# Altium PCB RelayBoard.PcbDoc (part 2 of 2)
Units mm, origin at the board's own origin, x right, y up, seen from the top; angles counter-clockwise.
Board outline 355 x 125 mm, 2 copper layers (Top Layer, Bottom Layer); 146 components, 100 nets, 450 pads, 452 vias.
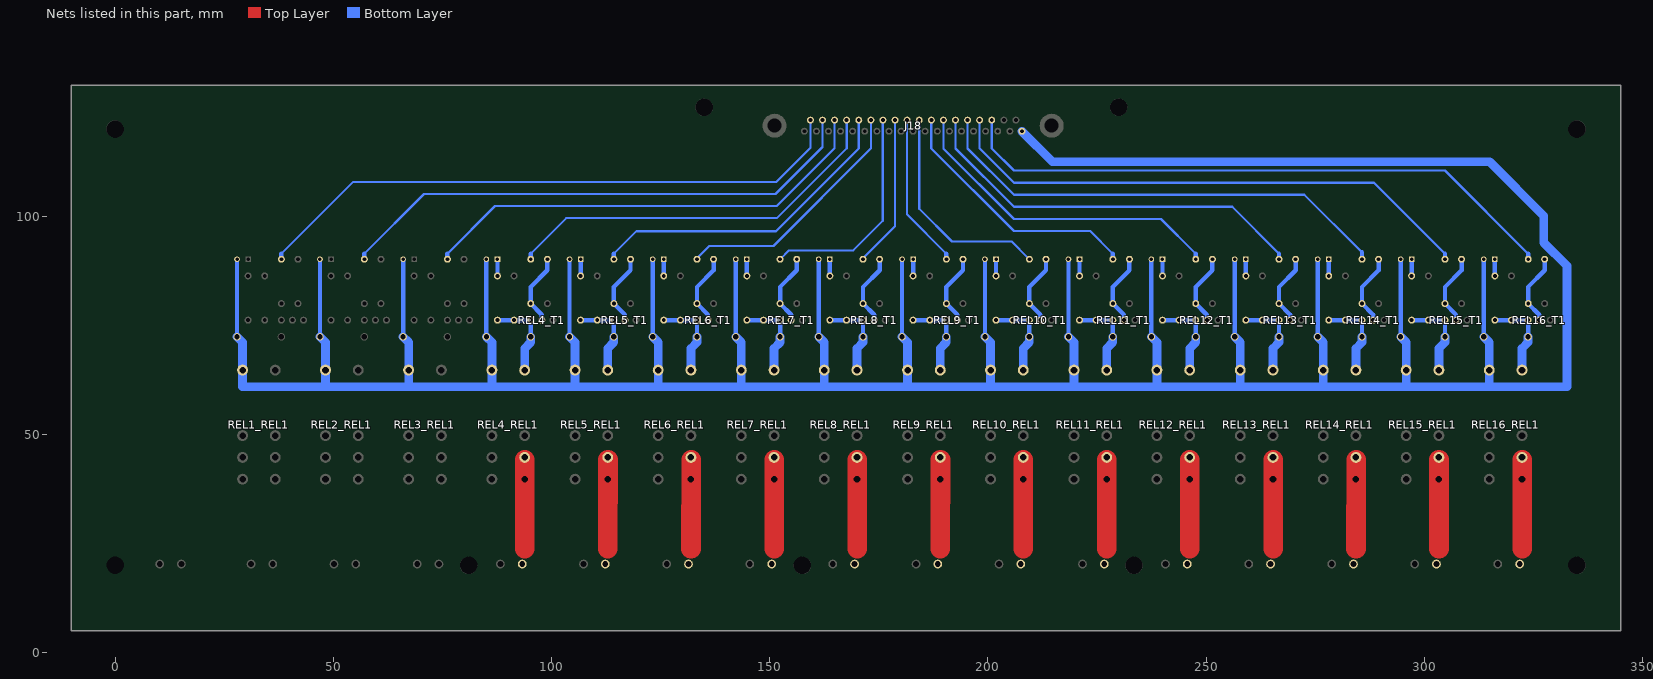
[diagram p2: the nets of this part, all layers, seen from the top]

## Via types
v1: diameter 1.6, hole 0.9, Top Layer to Bottom Layer, 452 vias

## Nets (pads, with @x,y where several pads share a name; then routed paths per layer and width w, separated by ;. In a path a pad name is that pad's centre, name@x,y a point inside that pad or via, vN(x,y) a via of type N, cw(c..) or ccw(c..) an arc to the next point about the centre after c; other vN are vias at no path point) (continued)
NetREL4_D1_2: REL4_D1.2 REL4_R1_3.1 REL4_R1_4.1 REL4_REL1.8 REL4_T1.3 | length 19.6
  Bottom Layer w1: REL4_R1_3.1@87.63,76.2 REL4_R1_4.1@91.44,76.2 REL4_T1.3@95.25,76.2 REL4_D1.2@95.25,72.39
  Bottom Layer w2: REL4_REL1.8@93.86,64.77 93.86,69.73 95.25,71.12 REL4_D1.2@95.25,72.39
NetREL4_J2_2: REL4_J2.2 REL4_REL1.6 | length 20.4
  Top Layer w4.5: 93.885,23.855 REL4_REL1.6@93.9,44.25
NetREL4_LD1_1: REL4_LD1.1 REL4_R1_3.2 | length 3.8
  Bottom Layer w1: REL4_R1_3.2@87.63,86.36 REL4_LD1.1@87.63,90.17
NetREL4_R1_1_2: REL4_R1_1.2 REL4_R1_2.2 REL4_T1.2 | length 16.6
  Bottom Layer w1: REL4_T1.2@97.79,76.2 97.79,77.47 REL4_R1_1.2@95.25,80.01 95.25,83.82 99.06,87.63 REL4_R1_2.2@99.06,90.17
NetREL5_D1_2: REL5_D1.2 REL5_R1_3.1 REL5_R1_4.1 REL5_REL1.8 REL5_T1.3 | length 19.6
  Bottom Layer w1: REL5_R1_3.1@106.68,76.2 REL5_R1_4.1@110.49,76.2 REL5_T1.3@114.3,76.2 REL5_D1.2@114.3,72.39
  Bottom Layer w2: REL5_REL1.8@112.91,64.77 112.91,69.73 114.3,71.12 REL5_D1.2@114.3,72.39
NetREL5_J2_2: REL5_J2.2 REL5_REL1.6 | length 20.4
  Top Layer w4.5: 112.935,23.855 REL5_REL1.6@112.95,44.25
NetREL5_LD1_1: REL5_LD1.1 REL5_R1_3.2 | length 3.8
  Bottom Layer w1: REL5_R1_3.2@106.68,86.36 REL5_LD1.1@106.68,90.17
NetREL5_R1_1_2: REL5_R1_1.2 REL5_R1_2.2 REL5_T1.2 | length 16.6
  Bottom Layer w1: REL5_T1.2@116.84,76.2 116.84,77.47 REL5_R1_1.2@114.3,80.01 114.3,83.82 118.11,87.63 REL5_R1_2.2@118.11,90.17
NetREL6_D1_2: REL6_D1.2 REL6_R1_3.1 REL6_R1_4.1 REL6_REL1.8 REL6_T1.3 | length 19.6
  Bottom Layer w1: REL6_R1_3.1@125.73,76.2 REL6_R1_4.1@129.54,76.2 REL6_T1.3@133.35,76.2 REL6_D1.2@133.35,72.39
  Bottom Layer w2: REL6_REL1.8@131.96,64.77 131.96,69.73 133.35,71.12 REL6_D1.2@133.35,72.39
NetREL6_J2_2: REL6_J2.2 REL6_REL1.6 | length 20.4
  Top Layer w4.5: 131.985,23.855 REL6_REL1.6@132,44.25
NetREL6_LD1_1: REL6_LD1.1 REL6_R1_3.2 | length 3.8
  Bottom Layer w1: REL6_R1_3.2@125.73,86.36 REL6_LD1.1@125.73,90.17
NetREL6_R1_1_2: REL6_R1_1.2 REL6_R1_2.2 REL6_T1.2 | length 16.6
  Bottom Layer w1: REL6_T1.2@135.89,76.2 135.89,77.47 REL6_R1_1.2@133.35,80.01 133.35,83.82 137.16,87.63 REL6_R1_2.2@137.16,90.17
NetREL7_D1_2: REL7_D1.2 REL7_R1_3.1 REL7_R1_4.1 REL7_REL1.8 REL7_T1.3 | length 19.6
  Bottom Layer w1: REL7_R1_3.1@144.78,76.2 REL7_R1_4.1@148.59,76.2 REL7_T1.3@152.4,76.2 REL7_D1.2@152.4,72.39
  Bottom Layer w2: REL7_REL1.8@151.01,64.77 151.01,69.73 152.4,71.12 REL7_D1.2@152.4,72.39
NetREL7_J2_2: REL7_J2.2 REL7_REL1.6 | length 20.4
  Top Layer w4.5: 151.035,23.855 REL7_REL1.6@151.05,44.25
NetREL7_LD1_1: REL7_LD1.1 REL7_R1_3.2 | length 3.8
  Bottom Layer w1: REL7_R1_3.2@144.78,86.36 REL7_LD1.1@144.78,90.17
NetREL7_R1_1_2: REL7_R1_1.2 REL7_R1_2.2 REL7_T1.2 | length 16.6
  Bottom Layer w1: REL7_T1.2@154.94,76.2 154.94,77.47 REL7_R1_1.2@152.4,80.01 152.4,83.82 156.21,87.63 REL7_R1_2.2@156.21,90.17
NetREL8_D1_2: REL8_D1.2 REL8_R1_3.1 REL8_R1_4.1 REL8_REL1.8 REL8_T1.3 | length 19.6
  Bottom Layer w1: REL8_R1_3.1@163.79,76.2 REL8_R1_4.1@167.6,76.2 REL8_T1.3@171.41,76.2 REL8_D1.2@171.41,72.39
  Bottom Layer w2: REL8_REL1.8@170.02,64.77 170.02,69.73 171.41,71.12 REL8_D1.2@171.41,72.39
NetREL8_J2_2: REL8_J2.2 REL8_REL1.6 | length 20.4
  Top Layer w4.5: 170.045,23.855 REL8_REL1.6@170.06,44.25
NetREL8_LD1_1: REL8_LD1.1 REL8_R1_3.2 | length 3.8
  Bottom Layer w1: REL8_R1_3.2@163.79,86.36 REL8_LD1.1@163.79,90.17
NetREL8_R1_1_2: REL8_R1_1.2 REL8_R1_2.2 REL8_T1.2 | length 16.6
  Bottom Layer w1: REL8_T1.2@173.95,76.2 173.95,77.47 REL8_R1_1.2@171.41,80.01 171.41,83.82 175.22,87.63 REL8_R1_2.2@175.22,90.17
NetREL9_D1_2: REL9_D1.2 REL9_R1_3.1 REL9_R1_4.1 REL9_REL1.8 REL9_T1.3 | length 19.6
  Bottom Layer w1: REL9_R1_3.1@182.88,76.2 REL9_R1_4.1@186.69,76.2 REL9_T1.3@190.5,76.2 REL9_D1.2@190.5,72.39
  Bottom Layer w2: REL9_REL1.8@189.11,64.77 189.11,69.73 190.5,71.12 REL9_D1.2@190.5,72.39
NetREL9_J2_2: REL9_J2.2 REL9_REL1.6 | length 20.4
  Top Layer w4.5: 189.135,23.855 REL9_REL1.6@189.15,44.25
NetREL9_LD1_1: REL9_LD1.1 REL9_R1_3.2 | length 3.8
  Bottom Layer w1: REL9_R1_3.2@182.88,86.36 REL9_LD1.1@182.88,90.17
NetREL9_R1_1_2: REL9_R1_1.2 REL9_R1_2.2 REL9_T1.2 | length 16.6
  Bottom Layer w1: REL9_T1.2@193.04,76.2 193.04,77.47 REL9_R1_1.2@190.5,80.01 190.5,83.82 194.31,87.63 REL9_R1_2.2@194.31,90.17
NetREL10_D1_2: REL10_D1.2 REL10_R1_3.1 REL10_R1_4.1 REL10_REL1.8 REL10_T1.3 | length 19.6
  Bottom Layer w1: REL10_R1_3.1@201.89,76.2 REL10_R1_4.1@205.7,76.2 REL10_T1.3@209.51,76.2 REL10_D1.2@209.51,72.39
  Bottom Layer w2: REL10_REL1.8@208.12,64.77 208.12,69.73 209.51,71.12 REL10_D1.2@209.51,72.39
NetREL10_J2_2: REL10_J2.2 REL10_REL1.6 | length 20.4
  Top Layer w4.5: 208.145,23.855 REL10_REL1.6@208.16,44.25
NetREL10_LD1_1: REL10_LD1.1 REL10_R1_3.2 | length 3.8
  Bottom Layer w1: REL10_R1_3.2@201.89,86.36 REL10_LD1.1@201.89,90.17
NetREL10_R1_1_2: REL10_R1_1.2 REL10_R1_2.2 REL10_T1.2 | length 16.6
  Bottom Layer w1: REL10_T1.2@212.05,76.2 212.05,77.47 REL10_R1_1.2@209.51,80.01 209.51,83.82 213.32,87.63 REL10_R1_2.2@213.32,90.17
NetREL11_D1_2: REL11_D1.2 REL11_R1_3.1 REL11_R1_4.1 REL11_REL1.8 REL11_T1.3 | length 19.6
  Bottom Layer w1: REL11_R1_3.1@221.02,76.2 REL11_R1_4.1@224.83,76.2 REL11_T1.3@228.64,76.2 REL11_D1.2@228.64,72.39
  Bottom Layer w2: REL11_REL1.8@227.25,64.77 227.25,69.73 228.64,71.12 REL11_D1.2@228.64,72.39
NetREL11_J2_2: REL11_J2.2 REL11_REL1.6 | length 20.4
  Top Layer w4.5: 227.275,23.855 REL11_REL1.6@227.29,44.25
NetREL11_LD1_1: REL11_LD1.1 REL11_R1_3.2 | length 3.8
  Bottom Layer w1: REL11_R1_3.2@221.02,86.36 REL11_LD1.1@221.02,90.17
NetREL11_R1_1_2: REL11_R1_1.2 REL11_R1_2.2 REL11_T1.2 | length 16.6
  Bottom Layer w1: REL11_T1.2@231.18,76.2 231.18,77.47 REL11_R1_1.2@228.64,80.01 228.64,83.82 232.45,87.63 REL11_R1_2.2@232.45,90.17
NetREL12_D1_2: REL12_D1.2 REL12_R1_3.1 REL12_R1_4.1 REL12_REL1.8 REL12_T1.3 | length 19.6
  Bottom Layer w1: REL12_R1_3.1@240.03,76.2 REL12_R1_4.1@243.84,76.2 REL12_T1.3@247.65,76.2 REL12_D1.2@247.65,72.39
  Bottom Layer w2: REL12_REL1.8@246.26,64.77 246.26,69.73 247.65,71.12 REL12_D1.2@247.65,72.39
NetREL12_J2_2: REL12_J2.2 REL12_REL1.6 | length 20.4
  Top Layer w4.5: 246.285,23.855 REL12_REL1.6@246.3,44.25
NetREL12_LD1_1: REL12_LD1.1 REL12_R1_3.2 | length 3.8
  Bottom Layer w1: REL12_R1_3.2@240.03,86.36 REL12_LD1.1@240.03,90.17
NetREL12_R1_1_2: REL12_R1_1.2 REL12_R1_2.2 REL12_T1.2 | length 16.6
  Bottom Layer w1: REL12_T1.2@250.19,76.2 250.19,77.47 REL12_R1_1.2@247.65,80.01 247.65,83.82 251.46,87.63 REL12_R1_2.2@251.46,90.17
NetREL13_D1_2: REL13_D1.2 REL13_R1_3.1 REL13_R1_4.1 REL13_REL1.8 REL13_T1.3 | length 19.6
  Bottom Layer w1: REL13_R1_3.1@259.12,76.2 REL13_R1_4.1@262.93,76.2 REL13_T1.3@266.74,76.2 REL13_D1.2@266.74,72.39
  Bottom Layer w2: REL13_REL1.8@265.35,64.77 265.35,69.73 266.74,71.12 REL13_D1.2@266.74,72.39
NetREL13_J2_2: REL13_J2.2 REL13_REL1.6 | length 20.4
  Top Layer w4.5: 265.375,23.855 REL13_REL1.6@265.39,44.25
NetREL13_LD1_1: REL13_LD1.1 REL13_R1_3.2 | length 3.8
  Bottom Layer w1: REL13_R1_3.2@259.12,86.36 REL13_LD1.1@259.12,90.17
NetREL13_R1_1_2: REL13_R1_1.2 REL13_R1_2.2 REL13_T1.2 | length 16.6
  Bottom Layer w1: REL13_T1.2@269.28,76.2 269.28,77.47 REL13_R1_1.2@266.74,80.01 266.74,83.82 270.55,87.63 REL13_R1_2.2@270.55,90.17
NetREL14_D1_2: REL14_D1.2 REL14_R1_3.1 REL14_R1_4.1 REL14_REL1.8 REL14_T1.3 | length 19.6
  Bottom Layer w1: REL14_R1_3.1@278.13,76.2 REL14_R1_4.1@281.94,76.2 REL14_T1.3@285.75,76.2 REL14_D1.2@285.75,72.39
  Bottom Layer w2: REL14_REL1.8@284.36,64.77 284.36,69.73 285.75,71.12 REL14_D1.2@285.75,72.39
NetREL14_J2_2: REL14_J2.2 REL14_REL1.6 | length 20.4
  Top Layer w4.5: 284.385,23.855 REL14_REL1.6@284.4,44.25
NetREL14_LD1_1: REL14_LD1.1 REL14_R1_3.2 | length 3.8
  Bottom Layer w1: REL14_R1_3.2@278.13,86.36 REL14_LD1.1@278.13,90.17
NetREL14_R1_1_2: REL14_R1_1.2 REL14_R1_2.2 REL14_T1.2 | length 16.6
  Bottom Layer w1: REL14_T1.2@288.29,76.2 288.29,77.47 REL14_R1_1.2@285.75,80.01 285.75,83.82 289.56,87.63 REL14_R1_2.2@289.56,90.17
NetREL15_D1_2: REL15_D1.2 REL15_R1_3.1 REL15_R1_4.1 REL15_REL1.8 REL15_T1.3 | length 19.6
  Bottom Layer w1: REL15_R1_3.1@297.14,76.2 REL15_R1_4.1@300.95,76.2 REL15_T1.3@304.76,76.2 REL15_D1.2@304.76,72.39
  Bottom Layer w2: REL15_REL1.8@303.37,64.77 303.37,69.73 304.76,71.12 REL15_D1.2@304.76,72.39
NetREL15_J2_2: REL15_J2.2 REL15_REL1.6 | length 20.4
  Top Layer w4.5: 303.395,23.855 REL15_REL1.6@303.41,44.25
NetREL15_LD1_1: REL15_LD1.1 REL15_R1_3.2 | length 3.8
  Bottom Layer w1: REL15_R1_3.2@297.14,86.36 REL15_LD1.1@297.14,90.17
NetREL15_R1_1_2: REL15_R1_1.2 REL15_R1_2.2 REL15_T1.2 | length 16.6
  Bottom Layer w1: REL15_T1.2@307.3,76.2 307.3,77.47 REL15_R1_1.2@304.76,80.01 304.76,83.82 308.57,87.63 REL15_R1_2.2@308.57,90.17
NetREL16_D1_2: REL16_D1.2 REL16_R1_3.1 REL16_R1_4.1 REL16_REL1.8 REL16_T1.3 | length 19.6
  Bottom Layer w1: REL16_R1_3.1@316.19,76.2 REL16_R1_4.1@320,76.2 REL16_T1.3@323.81,76.2 REL16_D1.2@323.81,72.39
  Bottom Layer w2: REL16_REL1.8@322.42,64.77 322.42,69.73 323.81,71.12 REL16_D1.2@323.81,72.39
NetREL16_J2_2: REL16_J2.2 REL16_REL1.6 | length 20.4
  Top Layer w4.5: 322.445,23.855 REL16_REL1.6@322.46,44.25
NetREL16_LD1_1: REL16_LD1.1 REL16_R1_3.2 | length 3.8
  Bottom Layer w1: REL16_R1_3.2@316.19,86.36 REL16_LD1.1@316.19,90.17
NetREL16_R1_1_2: REL16_R1_1.2 REL16_R1_2.2 REL16_T1.2 | length 16.6
  Bottom Layer w1: REL16_T1.2@326.35,76.2 326.35,77.47 323.81,80.01 323.81,83.82 327.62,87.63 REL16_R1_2.2@327.62,90.17
R1: J18.22 REL16_R1_1.1 | length 141
  Bottom Layer w0.5: J18.22@200.9,121.793 200.9,115.57 205.98,110.49 304.76,110.49 323.81,91.44 ; REL16_R1_1.1@323.81,90.17 323.81,90.13 REL16_R1_1.1@323.85,90.17 REL16_R1_1.1@323.85,90.693
  Bottom Layer w1: REL16_R1_1.1@323.81,90.17 323.81,91.44
R2: J18.23 REL15_R1_1.1 | length 124.4
  Top Layer w1: REL15_R1_1.1@304.76,90.17 REL15_R1_1.1@304.76,90.46
  Bottom Layer w0.5: J18.23@198.13,121.793 198.13,115.57 205.98,107.72 288.48,107.72 304.76,91.44
  Bottom Layer w1: REL15_R1_1.1@304.76,90.21 304.76,91.44
R3: J18.24 REL14_R1_1.1 | length 108.1
  Bottom Layer w0.5: J18.24@195.36,121.793 195.36,115.57 205.98,104.95 272.542,104.95 285.75,91.742
  Bottom Layer w1: REL14_R1_1.1@285.75,90.17 285.75,91.742
R4: J18.25 REL13_R1_1.1 | length 91.7
  Bottom Layer w0.5: J18.25@192.59,121.793 192.59,115.57 205.98,102.18 256,102.18 266.74,91.44
  Bottom Layer w1: REL13_R1_1.1@266.7,90.17 266.74,90.21 266.74,91.44
R5: J18.26 REL12_R1_1.1 | length 75.3
  Bottom Layer w0.5: J18.26@189.82,121.793 189.82,115.57 205.98,99.41 239.68,99.41 247.65,91.44
  Bottom Layer w1: REL12_R1_1.1@247.65,90.17 247.65,91.44
R6: J18.27 REL11_R1_1.1 | length 59.1
  Bottom Layer w0.5: J18.27@187.05,121.793 187.05,115.57 205.98,96.64 223.44,96.64 228.64,91.44
  Bottom Layer w1: REL11_R1_1.1@228.6,90.17 228.6,91.4 228.64,91.44
R7: J18.28 REL10_R1_1.1 | length 49.8
  Bottom Layer w0.5: J18.28@184.28,121.793 184.28,101.724 191.77,94.234 205.486,94.234 REL10_R1_1.1@209.296,90.424
R8: J18.29 REL9_R1_1.1 | length 35.3
  Bottom Layer w0.5: J18.29@181.51,121.793 181.51,100.43 190.5,91.44
  Bottom Layer w1: REL9_R1_1.1@190.5,90.17 190.5,91.44
R9: J18.30 REL8_R1_1.1 | length 34.4
  Bottom Layer w0.5: REL8_R1_1.1@171.41,90.384 178.74,97.714 J18.30@178.74,121.793
R10: J18.31 REL7_R1_1.1 | length 50
  Bottom Layer w0.5: REL7_R1_1.1@152.4,90.17 154.432,92.202 169.164,92.202 175.92,98.958 J18.31@175.92,121.793
R11: J18.32 REL6_R1_1.1 | length 56.5
  Bottom Layer w0.5: REL6_R1_1.1@133.35,90.424 136.144,93.218 150.876,93.218 173.2,115.542 J18.32@173.2,121.793
R12: J18.33 REL5_R1_1.1 | length 73.6
  Bottom Layer w0.5: 114.3,91.44 119.462,96.602 151.466,96.602 170.43,115.566 J18.33@170.43,121.793
  Bottom Layer w1: REL5_R1_1.1@114.3,90.17 114.3,91.44
R13: J18.34 REL4_R1_1.1 | length 89.9
  Bottom Layer w0.5: 95.25,91.44 103.402,99.592 151.662,99.592 167.66,115.59 J18.34@167.66,121.793
  Bottom Layer w1: REL4_R1_1.1@95.25,90.17 95.25,91.44
R14: J18.35 REL3_R1_1.1 | length 106.2
  Bottom Layer w0.5: 76.16,91.44 87.082,102.362 151.638,102.362 164.87,115.594 J18.35@164.87,121.793 ; J18.35@164.87,121.773 J18.35@164.89,121.793
  Bottom Layer w1: 76.16,91.44 76.16,90.21 REL3_R1_1.1@76.2,90.17
R15: J18.36 REL2_R1_1.1 | length 122.3
  Bottom Layer w0.5: 57.11,91.44 70.802,105.132 151.36,105.132 162.1,115.872 162.1,121.773 J18.36@162.12,121.793
  Bottom Layer w1: REL2_R1_1.1@57.11,90.17 57.11,91.44
R16: J18.37 REL1_R1_1.1 | length 138.7
  Bottom Layer w0.5: 38.1,91.44 54.562,107.902 151.59,107.902 159.33,115.642 J18.37@159.33,121.793 ; J18.37@159.33,121.773 J18.37@159.35,121.793
  Bottom Layer w1: REL1_R1_1.1@38.1,90.17 38.1,91.44
VCC: J18.1 REL1_D1.1 REL1_LD1.2 REL1_REL1.1 REL2_D1.1 REL2_LD1.2 REL2_REL1.1 REL3_D1.1 REL3_LD1.2 REL3_REL1.1 REL4_D1.1 REL4_LD1.2 REL4_REL1.1 REL5_D1.1 REL5_LD1.2 REL5_REL1.1 REL6_D1.1 REL6_LD1.2 REL6_REL1.1 REL7_D1.1 REL7_LD1.2 REL7_REL1.1 REL8_D1.1 REL8_LD1.2 REL8_REL1.1 REL9_D1.1 REL9_LD1.2 REL9_REL1.1 REL10_D1.1 REL10_LD1.2 REL10_REL1.1 REL11_D1.1 REL11_LD1.2 REL11_REL1.1 REL12_D1.1 REL12_LD1.2 REL12_REL1.1 REL13_D1.1 REL13_LD1.2 REL13_REL1.1 REL14_D1.1 REL14_LD1.2 REL14_REL1.1 REL15_D1.1 REL15_LD1.2 REL15_REL1.1 REL16_D1.1 REL16_LD1.2 REL16_REL1.1 | length 948.1
  Bottom Layer w1: REL1_D1.1@27.94,72.39 REL1_LD1.2@27.94,90.17 ; REL2_D1.1@46.95,72.39 REL2_LD1.2@46.95,90.17 ; REL3_D1.1@66,72.39 REL3_LD1.2@66,90.17 ; REL4_D1.1@85.09,72.39 REL4_LD1.2@85.09,90.17 ; REL5_D1.1@104.14,72.39 REL5_LD1.2@104.14,90.17 ; REL6_D1.1@123.19,72.39 REL6_LD1.2@123.19,90.17 ; REL7_D1.1@142.24,72.39 REL7_LD1.2@142.24,90.17 ; REL8_D1.1@161.25,72.39 REL8_LD1.2@161.25,90.17 ; REL9_D1.1@180.34,72.39 REL9_LD1.2@180.34,90.17 ; REL10_D1.1@199.35,72.39 REL10_LD1.2@199.35,90.17 ; REL11_D1.1@218.48,72.39 REL11_LD1.2@218.48,90.17 ; REL12_D1.1@237.49,72.39 REL12_LD1.2@237.49,90.17 ; REL13_D1.1@256.58,72.39 REL13_LD1.2@256.58,90.17 ; REL14_D1.1@275.59,72.39 REL14_LD1.2@275.59,90.17 ; REL15_D1.1@294.6,72.39 REL15_LD1.2@294.6,90.17 ; REL16_D1.1@313.65,72.39 REL16_LD1.2@313.65,90.17
  Bottom Layer w2: REL1_D1.1@27.94,72.39 29.21,71.12 REL1_REL1.1@29.21,64.77 29.21,60.96 48.22,60.96 ; REL2_D1.1@46.95,72.39 48.22,71.12 REL2_REL1.1@48.22,64.77 48.22,60.96 ; REL3_D1.1@66,72.39 67.27,71.12 REL3_REL1.1@67.27,64.77 67.27,60.96 ; REL4_D1.1@85.09,72.39 86.36,71.12 REL4_REL1.1@86.36,64.77 86.36,60.96 ; REL5_D1.1@104.14,72.39 105.41,71.12 REL5_REL1.1@105.41,64.77 105.41,60.96 ; REL6_D1.1@123.19,72.39 124.46,71.12 REL6_REL1.1@124.46,64.77 124.46,60.96 ; REL7_D1.1@142.24,72.39 143.51,71.12 REL7_REL1.1@143.51,64.77 143.51,60.96 ; REL8_D1.1@161.25,72.39 162.52,71.12 REL8_REL1.1@162.52,64.77 162.52,61 162.56,60.96 ; REL9_D1.1@180.34,72.39 181.61,71.12 REL9_REL1.1@181.61,64.77 181.61,60.96 ; REL10_D1.1@199.35,72.39 200.62,71.12 REL10_REL1.1@200.62,64.77 200.62,61.428 ; J18.1@207.81,119.507 214.817,112.5 315,112.5 327.406,100.094 327.406,93.98 332.74,88.646 332.74,60.96 314.96,60.96 314.92,60.92 REL16_REL1.1@314.92,64.77 314.92,71.12 REL16_D1.1@313.65,72.39 ; REL11_D1.1@218.48,72.39 219.75,71.12 REL11_REL1.1@219.75,64.77 219.75,61 ; REL12_D1.1@237.49,72.39 238.76,71.12 REL12_REL1.1@238.76,64.77 238.76,60.96 ; REL13_D1.1@256.58,72.39 257.85,71.12 REL13_REL1.1@257.85,64.77 257.85,61.174 ; REL14_D1.1@275.59,72.39 276.86,71.12 REL14_REL1.1@276.86,64.77 276.86,60.96 ; REL15_D1.1@294.6,72.39 295.87,71.12 REL15_REL1.1@295.87,64.77 295.87,61 ; 315.468,60.96 276.86,60.96 ; 48.22,60.96 67.27,60.96 ; 67.27,60.96 86.36,60.96 ; 86.36,60.96 105.41,60.96 ; 105.41,60.96 124.46,60.96 ; 124.46,60.96 143.51,60.96 ; 143.51,60.96 162.56,60.96 ; 162.56,60.96 181.61,60.96 ; 181.61,60.96 238.76,60.96 ; 238.76,60.96 276.86,60.96
pads on no net: J18.2 J18.3 J18.21 J18.38 J18.39 REL1_REL1.2 REL1_REL1.3 REL1_REL1.5 REL1_REL1.7 REL2_REL1.2 REL2_REL1.3 REL2_REL1.5 REL2_REL1.7 REL3_REL1.2 REL3_REL1.3 REL3_REL1.5 REL3_REL1.7 REL4_REL1.2 REL4_REL1.3 REL4_REL1.5 REL4_REL1.7 REL5_REL1.2 REL5_REL1.3 REL5_REL1.5 REL5_REL1.7 REL6_REL1.2 REL6_REL1.3 REL6_REL1.5 REL6_REL1.7 REL7_REL1.2 REL7_REL1.3 REL7_REL1.5 REL7_REL1.7 REL8_REL1.2 REL8_REL1.3 REL8_REL1.5 REL8_REL1.7 REL9_REL1.2 REL9_REL1.3 REL9_REL1.5 REL9_REL1.7 REL10_REL1.2 REL10_REL1.3 REL10_REL1.5 REL10_REL1.7 REL11_REL1.2 REL11_REL1.3 REL11_REL1.5 REL11_REL1.7 REL12_REL1.2 REL12_REL1.3 REL12_REL1.5 REL12_REL1.7 REL13_REL1.2 REL13_REL1.3 REL13_REL1.5 REL13_REL1.7 REL14_REL1.2 REL14_REL1.3 REL14_REL1.5 REL14_REL1.7 REL15_REL1.2 REL15_REL1.3 REL15_REL1.5 REL15_REL1.7 REL16_REL1.2 REL16_REL1.3 REL16_REL1.5 REL16_REL1.7
copper on no net: | length 960
  Top Layer w1.2: -10,5 345,5 345,130 -10,130 -10,5
  other v1: -2.54,60.96 0,60.96 2.54,60.96 5.08,60.96 7.62,60.96 10.16,60.96 12.7,60.96 15.24,60.96 -2.54,63.5 0,63.5 2.54,63.5 5.08,63.5 7.62,63.5 10.16,63.5 12.7,63.5 15.24,63.5 -2.54,66.04 0,66.04 2.54,66.04 5.08,66.04 7.62,66.04 10.16,66.04 12.7,66.04 15.24,66.04 -2.54,68.58 0,68.58 2.54,68.58 5.08,68.58 7.62,68.58 10.16,68.58 12.7,68.58 15.24,68.58 -2.54,71.12 0,71.12 2.54,71.12 5.08,71.12 7.62,71.12 10.16,71.12 12.7,71.12 15.24,71.12 -2.54,73.66 0,73.66 2.54,73.66 5.08,73.66 7.62,73.66 10.16,73.66 12.7,73.66 15.24,73.66 -2.54,76.2 0,76.2 2.54,76.2 5.08,76.2 7.62,76.2 10.16,76.2 12.7,76.2 15.24,76.2 -2.54,78.74 0,78.74 2.54,78.74 5.08,78.74 7.62,78.74 10.16,78.74 12.7,78.74 15.24,78.74 -2.54,81.28 0,81.28 2.54,81.28 5.08,81.28 7.62,81.28 10.16,81.28 12.7,81.28 15.24,81.28 -2.54,83.82 0,83.82 2.54,83.82 5.08,83.82 7.62,83.82 10.16,83.82 12.7,83.82 15.24,83.82 -2.54,86.36 0,86.36 2.54,86.36 5.08,86.36 7.62,86.36 10.16,86.36 12.7,86.36 15.24,86.36 -2.54,88.9 0,88.9 2.54,88.9 5.08,88.9 7.62,88.9 10.16,88.9 12.7,88.9 15.24,88.9 -2.54,91.44 0,91.44 2.54,91.44 5.08,91.44 7.62,91.44 10.16,91.44 12.7,91.44 15.24,91.44 17.78,91.44 20.32,91.44 22.86,91.44 25.4,91.44 -2.54,93.98 0,93.98 2.54,93.98 5.08,93.98 7.62,93.98 10.16,93.98 12.7,93.98 15.24,93.98 17.78,93.98 20.32,93.98 22.86,93.98 25.4,93.98 -2.54,96.52 0,96.52 2.54,96.52 5.08,96.52 7.62,96.52 10.16,96.52 12.7,96.52 15.24,96.52 17.78,96.52 20.32,96.52 22.86,96.52 25.4,96.52 -2.54,99.06 0,99.06 2.54,99.06 5.08,99.06 7.62,99.06 10.16,99.06 12.7,99.06 15.24,99.06 17.78,99.06 20.32,99.06 22.86,99.06 25.4,99.06 -2.54,101.6 0,101.6 2.54,101.6 5.08,101.6 7.62,101.6 10.16,101.6 12.7,101.6 15.24,101.6 17.78,101.6 20.32,101.6 22.86,101.6 25.4,101.6 5.08,104.14 7.62,104.14 10.16,104.14 12.7,104.14 15.24,104.14 17.78,104.14 20.32,104.14 22.86,104.14 25.4,104.14 5.08,106.68 7.62,106.68 10.16,106.68 12.7,106.68 15.24,106.68 17.78,106.68 20.32,106.68 22.86,106.68 25.4,106.68 5.08,109.22 7.62,109.22 10.16,109.22 12.7,109.22 15.24,109.22 17.78,109.22 20.32,109.22 22.86,109.22 25.4,109.22 27.94,109.22 30.48,109.22 33.02,109.22 35.56,109.22 38.1,109.22 40.64,109.22 43.18,109.22 5.08,111.76 7.62,111.76 10.16,111.76 12.7,111.76 15.24,111.76 17.78,111.76 20.32,111.76 22.86,111.76 25.4,111.76 27.94,111.76 30.48,111.76 33.02,111.76 35.56,111.76 38.1,111.76 40.64,111.76 43.18,111.76 45.72,111.76 5.08,114.3 7.62,114.3 10.16,114.3 12.7,114.3 15.24,114.3 17.78,114.3 20.32,114.3 22.86,114.3 25.4,114.3 27.94,114.3 30.48,114.3 33.02,114.3 35.56,114.3 38.1,114.3 40.64,114.3 43.18,114.3 45.72,114.3 48.26,114.3 50.8,114.3 53.34,114.3 55.88,114.3 58.42,114.3 60.96,114.3 63.5,114.3 66.04,114.3 68.58,114.3 71.12,114.3 73.66,114.3 76.2,114.3 78.74,114.3 81.28,114.3 83.82,114.3 86.36,114.3 88.9,114.3 91.44,114.3 93.98,114.3 96.52,114.3 99.06,114.3 101.6,114.3 104.14,114.3 106.68,114.3 109.22,114.3 111.76,114.3 114.3,114.3 116.84,114.3 119.38,114.3 121.92,114.3 124.46,114.3 127,114.3 5.08,116.84 7.62,116.84 10.16,116.84 12.7,116.84 15.24,116.84 17.78,116.84 20.32,116.84 22.86,116.84 25.4,116.84 27.94,116.84 30.48,116.84 33.02,116.84 35.56,116.84 38.1,116.84 40.64,116.84 43.18,116.84 45.72,116.84 48.26,116.84 50.8,116.84 53.34,116.84 55.88,116.84 58.42,116.84 60.96,116.84 63.5,116.84 66.04,116.84 68.58,116.84 71.12,116.84 73.66,116.84 76.2,116.84 78.74,116.84 81.28,116.84 83.82,116.84 86.36,116.84 88.9,116.84 91.44,116.84 93.98,116.84 96.52,116.84 99.06,116.84 101.6,116.84 104.14,116.84 106.68,116.84 109.22,116.84 111.76,116.84 114.3,116.84 116.84,116.84 119.38,116.84 121.92,116.84 124.46,116.84 127,116.84 5.08,119.38 7.62,119.38 10.16,119.38 12.7,119.38 15.24,119.38 17.78,119.38 20.32,119.38 22.86,119.38 25.4,119.38 27.94,119.38 30.48,119.38 33.02,119.38 35.56,119.38 38.1,119.38 40.64,119.38 43.18,119.38 45.72,119.38 48.26,119.38 50.8,119.38 53.34,119.38 55.88,119.38 58.42,119.38 60.96,119.38 63.5,119.38 66.04,119.38 68.58,119.38 71.12,119.38 73.66,119.38 76.2,119.38 78.74,119.38 81.28,119.38 83.82,119.38 86.36,119.38 88.9,119.38 91.44,119.38 93.98,119.38 96.52,119.38 99.06,119.38 101.6,119.38 104.14,119.38 106.68,119.38 109.22,119.38 111.76,119.38 114.3,119.38 116.84,119.38 119.38,119.38 121.92,119.38 124.46,119.38 127,119.38 5.08,121.92 7.62,121.92 10.16,121.92 12.7,121.92 15.24,121.92 17.78,121.92 20.32,121.92 22.86,121.92 25.4,121.92 27.94,121.92 30.48,121.92 33.02,121.92 35.56,121.92 38.1,121.92 40.64,121.92 43.18,121.92 45.72,121.92 48.26,121.92 50.8,121.92 53.34,121.92 55.88,121.92 58.42,121.92 60.96,121.92 63.5,121.92 66.04,121.92 68.58,121.92 71.12,121.92 73.66,121.92 76.2,121.92 78.74,121.92 81.28,121.92 83.82,121.92 86.36,121.92 88.9,121.92 91.44,121.92 93.98,121.92 96.52,121.92 99.06,121.92 101.6,121.92 104.14,121.92 106.68,121.92 109.22,121.92 111.76,121.92 114.3,121.92 116.84,121.92 119.38,121.92 121.92,121.92 124.46,121.92 127,121.92 5.08,124.46 7.62,124.46 10.16,124.46 12.7,124.46 15.24,124.46 17.78,124.46 20.32,124.46 22.86,124.46 25.4,124.46 27.94,124.46 30.48,124.46 33.02,124.46 35.56,124.46 38.1,124.46 40.64,124.46 43.18,124.46 45.72,124.46 48.26,124.46 50.8,124.46 53.34,124.46 55.88,124.46 58.42,124.46 60.96,124.46 63.5,124.46 66.04,124.46 68.58,124.46 71.12,124.46 73.66,124.46 76.2,124.46 78.74,124.46 81.28,124.46 83.82,124.46 86.36,124.46 88.9,124.46 91.44,124.46 93.98,124.46 96.52,124.46 99.06,124.46 101.6,124.46 104.14,124.46 106.68,124.46 109.22,124.46 111.76,124.46 114.3,124.46 116.84,124.46 119.38,124.46 121.92,124.46 124.46,124.46 127,124.46

## Polygon pours and split planes (outlines as drawn)
AC on Bottom Layer "Top Layer-No Net" (solid, pour order 69): 25.5,37.5 30.5,37.5 31.5,38.5 31.5,41 30.5,42 26.7,42 25.6,41.3
AC on Bottom Layer "Top Layer-No Net" (solid, pour order 70): 6.8,25 6.8,19 8,17.8 10.8,17.8 12,19 12,25
N on Bottom Layer "Top Layer-No Net" (solid, pour order 71): 15.24,22.86 13.97,21.59 13.97,19.05 15.24,17.78 31.75,17.78 33.02,19.05 33.02,21.59 31.75,22.86
N on Bottom Layer "Top Layer-No Net" (solid, pour order 66): 51.75,14 51.75,21.5 51,22.25 48.25,22.25 47.5,21.5 47.5,14
N on Bottom Layer "Top Layer-No Net" (solid, pour order 65): 70.8,14 70.8,21.5 70.05,22.25 67.3,22.25 66.55,21.5 66.55,14
N on Bottom Layer "Top Layer-No Net" (solid, pour order 64): 89.89,14 89.89,21.5 89.14,22.25 86.39,22.25 85.64,21.5 85.64,14
N on Bottom Layer "Top Layer-No Net" (solid, pour order 63): 108.94,14 108.94,21.5 108.19,22.25 105.44,22.25 104.69,21.5 104.69,14
N on Bottom Layer "Top Layer-No Net" (solid, pour order 62): 127.99,14 127.99,21.5 127.24,22.25 124.49,22.25 123.74,21.5 123.74,14
N on Bottom Layer "Top Layer-No Net" (solid, pour order 61): 147.04,14 147.04,21.5 146.29,22.25 143.54,22.25 142.79,21.5 142.79,14
N on Bottom Layer "Top Layer-No Net" (solid, pour order 60): 166.05,14 166.05,21.5 165.3,22.25 162.55,22.25 161.8,21.5 161.8,14
N on Bottom Layer "Top Layer-No Net" (solid, pour order 59): 185.14,14 185.14,21.5 184.39,22.25 181.64,22.25 180.89,21.5 180.89,14
N on Bottom Layer "Top Layer-No Net" (solid, pour order 58): 204.15,14 204.15,21.5 203.4,22.25 200.65,22.25 199.9,21.5 199.9,14
N on Bottom Layer "Top Layer-No Net" (solid, pour order 57): 223.28,14 223.28,21.5 222.53,22.25 219.78,22.25 219.03,21.5 219.03,14
N on Bottom Layer "Top Layer-No Net" (solid, pour order 56): 242.29,14 242.29,21.5 241.54,22.25 238.79,22.25 238.04,21.5 238.04,14
N on Bottom Layer "Top Layer-No Net" (solid, pour order 55): 261.38,14 261.38,21.5 260.63,22.25 257.88,22.25 257.13,21.5 257.13,14
N on Bottom Layer "Top Layer-No Net" (solid, pour order 54): 280.39,14 280.39,21.5 279.64,22.25 276.89,22.25 276.14,21.5 276.14,14
N on Bottom Layer "Top Layer-No Net" (solid, pour order 53): 299.4,14 299.4,21.5 298.65,22.25 295.9,22.25 295.15,21.5 295.15,14
N on Bottom Layer "Top Layer-No Net" (solid, pour order 52): 318.45,12.1 318.45,21.5 317.7,22.25 314.95,22.25 314.2,21.5 314.2,12.1
NetREL16_J2_2 on Top Layer "Top Layer-No Net" (solid, pour order 37): 320.17,24 320.17,19 321.17,18 323.67,18 324.67,19 324.67,24
NetREL15_J2_2 on Top Layer "Top Layer-No Net" (solid, pour order 38): 301.12,24 301.12,19 302.12,18 304.62,18 305.62,19 305.62,24
NetREL14_J2_2 on Top Layer "Top Layer-No Net" (solid, pour order 39): 282.11,24 282.11,19 283.11,18 285.61,18 286.61,19 286.61,24
NetREL13_J2_2 on Top Layer "Top Layer-No Net" (solid, pour order 40): 263.1,24 263.1,19 264.1,18 266.6,18 267.6,19 267.6,24
NetREL12_J2_2 on Top Layer "Top Layer-No Net" (solid, pour order 41): 244.01,24 244.01,19 245.01,18 247.51,18 248.51,19 248.51,24
NetREL11_J2_2 on Top Layer "Top Layer-No Net" (solid, pour order 42): 225,24 225,19 226,18 228.5,18 229.5,19 229.5,24
NetREL10_J2_2 on Top Layer "Top Layer-No Net" (solid, pour order 43): 205.87,24 205.87,19 206.87,18 209.37,18 210.37,19 210.37,24
NetREL9_J2_2 on Top Layer "Top Layer-No Net" (solid, pour order 44): 186.9,24 186.9,19 187.9,18 190.4,18 191.4,19 191.4,24
NetREL8_J2_2 on Top Layer "Top Layer-No Net" (solid, pour order 45): 167.77,24 167.77,19 168.77,18 171.27,18 172.27,19 172.27,24
NetREL7_J2_2 on Top Layer "Top Layer-No Net" (solid, pour order 46): 148.76,24 148.76,19 149.76,18 152.26,18 153.26,19 153.26,24
NetREL6_J2_2 on Top Layer "Top Layer-No Net" (solid, pour order 47): 129.71,24 129.71,19 130.71,18 133.21,18 134.21,19 134.21,24
NetREL5_J2_2 on Top Layer "Top Layer-No Net" (solid, pour order 48): 110.66,24 110.66,19 111.66,18 114.16,18 115.16,19 115.16,24
NetREL4_J2_2 on Top Layer "Top Layer-No Net" (solid, pour order 49): 91.61,24 91.61,19 92.61,18 95.11,18 96.11,19 96.11,24
NetREL3_J2_2 on Top Layer "Top Layer-No Net" (solid, pour order 50): 72.52,24 72.52,19 73.52,18 76.02,18 77.02,19 77.02,24
NetREL2_J2_2 on Top Layer "Top Layer-No Net" (solid, pour order 51): 53.47,24 53.47,19 54.47,18 56.97,18 57.97,19 57.97,24
NetREL1_J2_2 on Top Layer "Top Layer-No Net" (solid, pour order 67): 39,43.5 39,46 38,47 35.5,47 34.5,46 34.5,43.5
NetREL1_J2_2 on Top Layer "Top Layer-No Net" (solid, pour order 68): 34.5,24 34.5,19 35.5,18 38,18 39,19 39,24
GND on Top Layer "Top Layer-No Net" (solid, pour order 72): 334,60 334,97 316,115 229,115 217,127 149,127 133,111 50,111 23,84 23,60

## Silkscreen, mask and mechanical layers (free items; w line width, h text height)
Top Overlay:
  text "L" at 4.5,15 h5
  text "N" at 19,15 h5
  text "~220 V" at 7,11 h5
  text "OUT 1" at 28.5,11 h5
  text "OUT 2" at 47.5,11 h5
  text "OUT 3" at 66.5,11 h5
  text "OUT 4" at 85.5,11 h5
  text "OUT 5" at 104.5,11 h5
  text "OUT 6" at 123.5,11 h5
  text "OUT 7" at 142.5,11 h5
  text "OUT 8" at 161.5,11 h5
  text "OUT 9" at 180.5,11 h5
  text "OUT 10" at 199.5,11 h5
  text "OUT 11" at 218.5,11 h5
  text "OUT 12" at 237.5,11 h5
  text "OUT 13" at 257,11 h5
  text "OUT 14" at 276,11 h5
  text "OUT 15" at 295,11 h5
  text "OUT 16" at 314,11 h5

## Text inside footprints (layer, text, board x,y; h text height)
J1: Top Overlay "1" at 9.92,16.398 h1; Top Overlay "2" at 14.919,16.398 h1; Mechanical 14 "2" at 14.919,16.398 h1; Mechanical 14 "1" at 9.92,16.398 h1
J18: Top Overlay "20" at 209.061,121.285 h1.2; Top Overlay "1" at 209.061,118.745 h1.2; Top Overlay "19" at 154.67,118.777 h1.2; Top Overlay "37" at 155.683,121.285 h1.2
REL1_J2: Top Overlay "1" at 30.875,16.398 h1; Top Overlay "2" at 35.874,16.398 h1; Mechanical 14 "2" at 35.874,16.398 h1; Mechanical 14 "1" at 30.875,16.398 h1
REL2_J2: Top Overlay "1" at 49.885,16.398 h1; Top Overlay "2" at 54.884,16.398 h1; Mechanical 14 "2" at 54.884,16.398 h1; Mechanical 14 "1" at 49.885,16.398 h1
REL3_J2: Top Overlay "1" at 68.935,16.398 h1; Top Overlay "2" at 73.934,16.398 h1; Mechanical 14 "2" at 73.934,16.398 h1; Mechanical 14 "1" at 68.935,16.398 h1
REL4_J2: Top Overlay "1" at 88.025,16.398 h1; Top Overlay "2" at 93.024,16.398 h1; Mechanical 14 "2" at 93.024,16.398 h1; Mechanical 14 "1" at 88.025,16.398 h1
REL5_J2: Top Overlay "1" at 107.075,16.398 h1; Top Overlay "2" at 112.074,16.398 h1; Mechanical 14 "2" at 112.074,16.398 h1; Mechanical 14 "1" at 107.075,16.398 h1
REL6_J2: Top Overlay "1" at 126.125,16.398 h1; Top Overlay "2" at 131.124,16.398 h1; Mechanical 14 "2" at 131.124,16.398 h1; Mechanical 14 "1" at 126.125,16.398 h1
REL7_J2: Top Overlay "1" at 145.175,16.398 h1; Top Overlay "2" at 150.174,16.398 h1; Mechanical 14 "2" at 150.174,16.398 h1; Mechanical 14 "1" at 145.175,16.398 h1
REL8_J2: Top Overlay "1" at 164.185,16.398 h1; Top Overlay "2" at 169.184,16.398 h1; Mechanical 14 "2" at 169.184,16.398 h1; Mechanical 14 "1" at 164.185,16.398 h1
REL9_J2: Top Overlay "1" at 183.275,16.398 h1; Top Overlay "2" at 188.274,16.398 h1; Mechanical 14 "2" at 188.274,16.398 h1; Mechanical 14 "1" at 183.275,16.398 h1
REL10_J2: Top Overlay "1" at 202.285,16.398 h1; Top Overlay "2" at 207.284,16.398 h1; Mechanical 14 "2" at 207.284,16.398 h1; Mechanical 14 "1" at 202.285,16.398 h1
REL11_J2: Top Overlay "1" at 221.415,16.398 h1; Top Overlay "2" at 226.414,16.398 h1; Mechanical 14 "2" at 226.414,16.398 h1; Mechanical 14 "1" at 221.415,16.398 h1
REL12_J2: Top Overlay "1" at 240.425,16.398 h1; Top Overlay "2" at 245.424,16.398 h1; Mechanical 14 "2" at 245.424,16.398 h1; Mechanical 14 "1" at 240.425,16.398 h1
REL13_J2: Top Overlay "1" at 259.515,16.398 h1; Top Overlay "2" at 264.514,16.398 h1; Mechanical 14 "2" at 264.514,16.398 h1; Mechanical 14 "1" at 259.515,16.398 h1
REL14_J2: Top Overlay "1" at 278.525,16.398 h1; Top Overlay "2" at 283.524,16.398 h1; Mechanical 14 "2" at 283.524,16.398 h1; Mechanical 14 "1" at 278.525,16.398 h1
REL15_J2: Top Overlay "1" at 297.535,16.398 h1; Top Overlay "2" at 302.534,16.398 h1; Mechanical 14 "2" at 302.534,16.398 h1; Mechanical 14 "1" at 297.535,16.398 h1
REL16_J2: Top Overlay "1" at 316.585,16.398 h1; Top Overlay "2" at 321.584,16.398 h1; Mechanical 14 "2" at 321.584,16.398 h1; Mechanical 14 "1" at 316.585,16.398 h1